# EAGLE board 20140312_FT_1.2b (EAGLE 6.5.0)
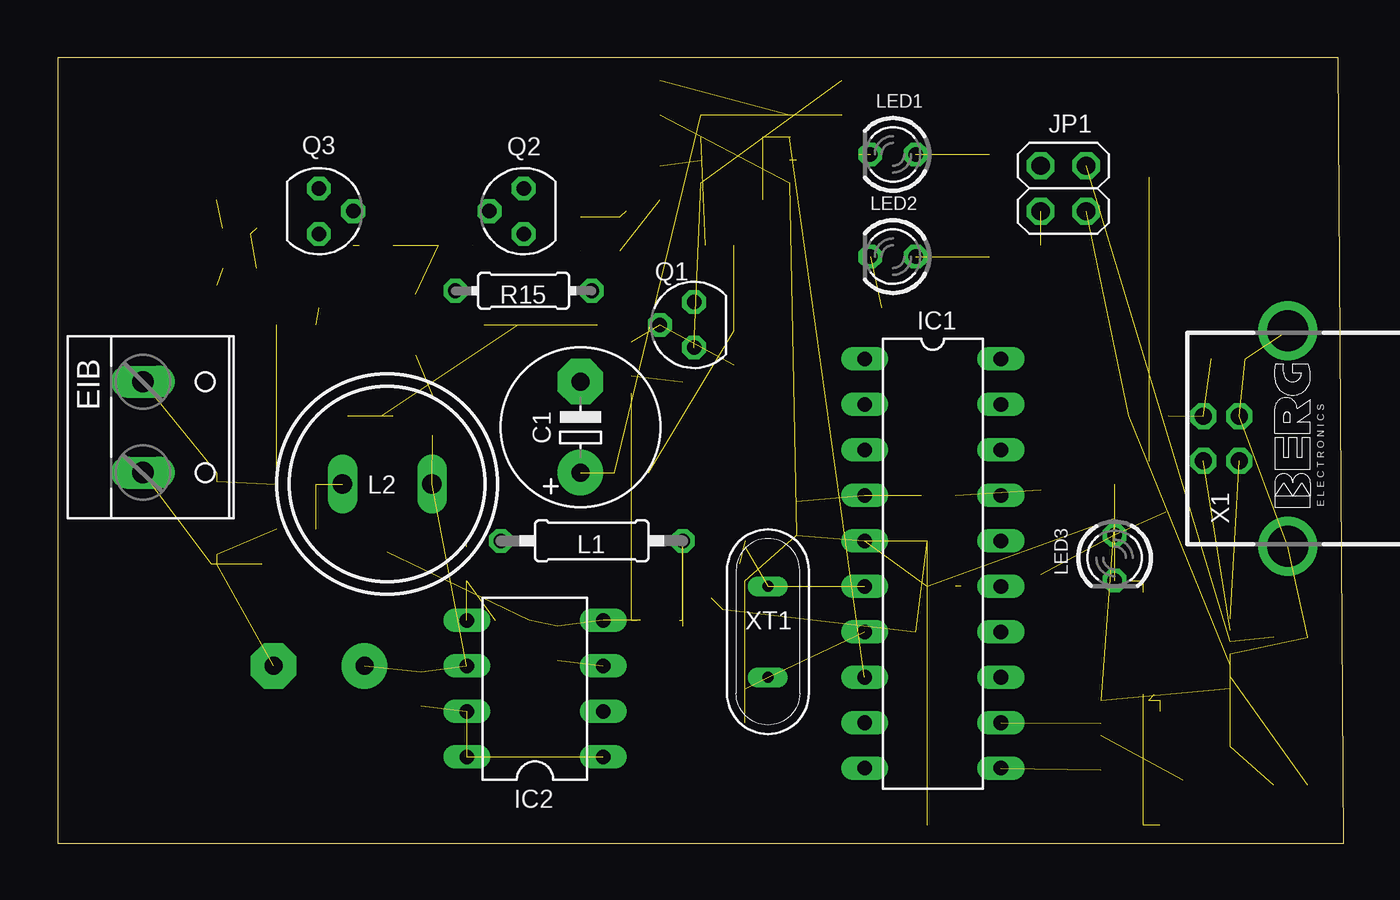
[diagram p0: board, top side]
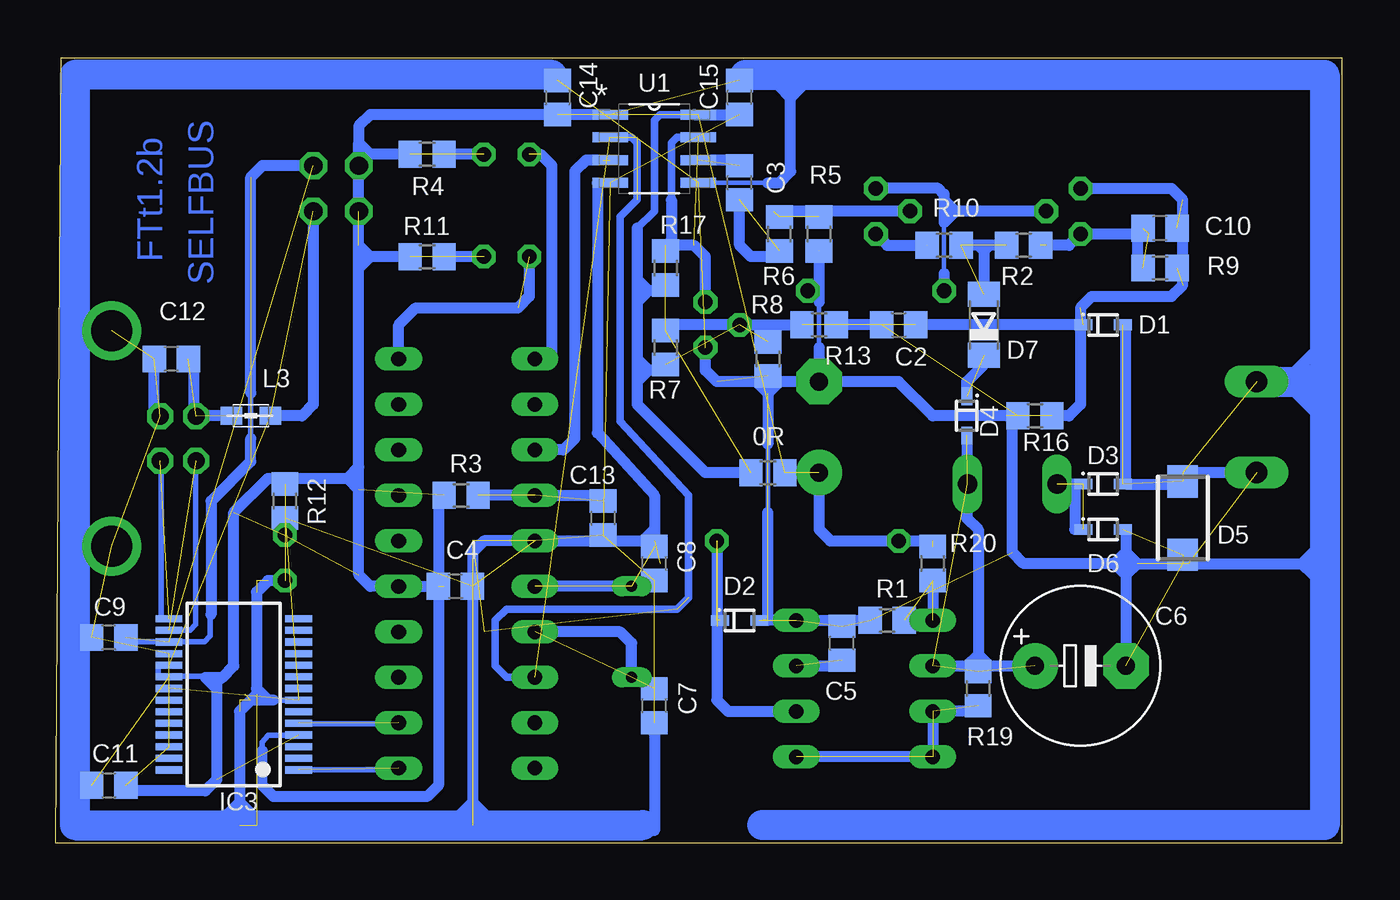
[diagram p1: board, bottom side, seen from below]

Size 71.86 x 43.87 mm. Coordinates in mm from the lower left corner, seen from the top.
Outline: 0,0 71.86,0 71.54,43.87 0,43.87 0,0
Copper layers (1*16): Top 0.035mm / dielectric 1.5mm / Bottom 0.035mm
Design rules "default": minimum track width 10mil, minimum drill 24mil, track to track 8mil, track to pad 8mil, pad to pad 8mil, via to via 8mil, smd to smd 8mil, copper to edge 40mil, drill to drill 8mil, minimum pad ring 10mil, minimum via ring 8mil, stop-mask expansion 4mil, vias tented up to drill 0mil, thermal gap 10mil

## Footprints (pad centres in the part's own frame; a part is rotated, then mirrored left to right if it is on the bottom)
R0805 = smd 1.3 x 1.5: 1 -0.95,0; 2 0.95,0
E5-8,5 = drill 1.016 pad 2.54: + -2.54,0 | drill 1.016 pad 2.54 octagon: - 2.54,0
C0805 = smd 1.3 x 1.5: 1 -0.95,0; 2 0.95,0
SOD323F = smd 1 x 0.6: A 1.1,0; C -1.1,0
SMA = smd 1.8 x 1.7: 1 -2.05,0; 2 2.05,0
SOD80C = smd 1.4 x 1.8: A 1.7,0; C -1.7,0
W237-132 = drill 1.194 long: 1 -2.54,-0.635; 2 2.54,-0.635
DIL20 = drill 0.813 long: 1 -11.43,-3.81; 2 -8.89,-3.81; 3 -6.35,-3.81; 4 -3.81,-3.81; 5 -1.27,-3.81; 6 1.27,-3.81; 7 3.81,-3.81; 8 6.35,-3.81; 9 8.89,-3.81; 10 11.43,-3.81; 11 11.43,3.81; 12 8.89,3.81; 13 6.35,3.81; 14 3.81,3.81; 15 1.27,3.81; 16 -1.27,3.81; 17 -3.81,3.81; 18 -6.35,3.81; 19 -8.89,3.81; 20 -11.43,3.81
DIL08 = drill 0.813 long: 1 -3.81,-3.81; 2 -1.27,-3.81; 3 1.27,-3.81; 4 3.81,-3.81; 5 3.81,3.81; 6 1.27,3.81; 7 -1.27,3.81; 8 -3.81,3.81
SSOP28 = smd 0.4 x 1.5: 1 -4.225,-3.625; 2 -3.575,-3.625; 3 -2.925,-3.625; 4 -2.275,-3.625; 5 -1.625,-3.625; 6 -0.975,-3.625; 7 -0.325,-3.625; 8 0.325,-3.625; 9 0.975,-3.625; 10 1.625,-3.625; 11 2.275,-3.625; 12 2.925,-3.625; 13 3.575,-3.625; 14 4.225,-3.625; 15 4.225,3.625; 16 3.575,3.625; 17 2.925,3.625; 18 2.275,3.625; 19 1.625,3.625; 20 0.975,3.625; 21 0.325,3.625; 22 -0.325,3.625; 23 -0.975,3.625; 24 -1.625,3.625; 25 -2.275,3.625; 26 -2.925,3.625; 27 -3.575,3.625; 28 -4.225,3.625
2X02 = drill 1.016 octagon: 1 -1.27,-1.27; 2 -1.27,1.27; 3 1.27,-1.27; 4 1.27,1.27
0207/10 = drill 0.813 octagon: 1 -5.08,0; 2 5.08,0
SD12_1000 = drill 1.1 long: 1 -2.5,0; 2 2.5,0
0805 = smd 1.2 x 1: 1 -1.1,0; 2 1.1,0
LED3MM = drill 0.813 octagon: A -1.27,0; K 1.27,0
SOT54A = drill 0.813 octagon: B 0,1.905; C -1.27,0; E 1.27,0
SOT54D = drill 0.813 octagon: B 1.27,0; C 0,1.905; E -1.27,0
0204/7 = drill 0.813 octagon: 1 -3.81,0; 2 3.81,0
SOIC127P600X175-8N = smd 1.981 x 0.559: 1 -2.464,1.905; 2 -2.464,0.635; 3 -2.464,-0.635; 4 -2.464,-1.905; 5 2.464,-1.905; 6 2.464,-0.635; 7 2.464,0.635; 8 2.464,1.905
PN61729-S = drill 0.95 octagon: 1 1.25,4.71; 2 -1.25,4.71; 3 -1.25,2.71; 4 1.25,2.71 | drill 2.3 pad 2.9: S1 -6.02,0; S2 6.02,0
QS = drill 0.61 long: 1 -2.54,0; 2 2.54,0

## Placement (x,y rotation side)
0R  [R0805]  32.07,20.7 0 bottom
C1  100Uf/16V  [E5-8,5]  29.21,23.24 90 top
C2  100nF  [C0805]  24.77,28.96 0 bottom
C3  10nF  [C0805]  33.66,36.89 90 bottom
C4  100nF  [C0805]  49.53,14.35 180 bottom
C5  470pF  [C0805]  27.94,11.18 90 bottom
C6  100uF/63v  [E5-8,5]  14.61,9.91 0 bottom
C7  30pF  [C0805]  38.42,7.68 90 bottom
C8  30pF  [C0805]  38.42,15.62 90 bottom
C9  100nF  [C0805]  68.9,11.49 180 bottom
C10  10nF  [C0805]  10.16,34.35 180 bottom
C11  100nF  [C0805]  68.9,3.24 0 bottom
C12  10nF  [C0805]  65.41,27.05 180 bottom
C13  100nF  [C0805]  41.27,18.16 90 bottom
C14  100nF  [C0805]  43.81,41.66 270 bottom
C15  100nF  [C0805]  33.66,41.66 90 bottom
D1  1N4148  [SOD323F]  13.34,28.96 0 bottom
D2  BAT46  [SOD323F]  33.66,12.45 0 bottom
D3  1N4148  [SOD323F]  13.34,20.07 0 bottom
D4  1N4148  [SOD323F]  20.95,23.88 270 bottom
D5  SMAJ43CA  [SMA]  8.89,18.16 90 bottom
D6  1N4148  [SOD323F]  13.34,17.53 0 bottom
D7  7V5  [SOD80C]  20,28.96 90 bottom
EIB  [W237-132]  5.4,23.24 270 top
IC1  [DIL20]  48.9,15.62 270 top
IC2  [DIL08]  26.67,8.64 90 top
IC3  FT232RL  [SSOP28]  61.91,8.32 90 bottom
JP1  [2X02]  56.2,36.58 90 top
L1  220uH  [0207/10]  29.84,16.89 0 top
L2  150mH  [SD12_1000]  18.41,20.07 0 top
L3  Ferrite bead  [0805]  60.96,23.88 0 bottom
LED1  [LED3MM]  46.67,38.48 180 top
LED2  [LED3MM]  46.67,32.77 180 top
LED3  [LED3MM]  59.05,15.94 270 top
Q1  BC557B  [SOT54A]  35.56,28.96 90 top
Q2  BC547  [SOT54A]  26.04,35.31 90 top
Q3  BC640  [SOT54D]  14.61,35.31 270 top
R1  2K2  [R0805]  25.4,12.45 0 bottom
R2  1K  [R0805]  17.78,33.4 0 bottom
R3  5K6  [R0805]  49.21,19.43 0 bottom
R4  470R  [R0805]  51.12,38.48 180 bottom
R5  100K  [R0805]  29.21,34.04 270 bottom
R6  5K6  [R0805]  31.43,34.04 270 bottom
R7  47K  [R0805]  37.78,27.69 90 bottom
R8  47K  [R0805]  32.07,27.05 90 bottom
R9  1K  [R0805]  10.16,32.13 180 bottom
R10  2K2  [R0805]  22.23,33.4 0 bottom
R11  470R  [R0805]  51.12,32.77 180 bottom
R12  470R  [R0805]  59.05,19.11 270 bottom
R13  10K  [R0805]  29.21,28.96 0 bottom
R15  5R6  [0204/7]  26.04,30.86 180 top
R16  100K  [R0805]  17.14,23.88 180 bottom
R17  10K  [R0805]  37.78,32.13 90 bottom
R19  3R3  [R0805]  20.32,8.64 90 bottom
R20  3K6  [R0805]  22.86,15.62 90 bottom
U1  ADUM1201ARZ  [SOIC127P600X175-8N]  38.42,38.8 0 bottom
X1  [PN61729-S]  68.74,22.61 90 top
XT1  7.372800  [QS]  39.69,11.81 270 top

## Library data of the parts
0R C1-C15 L1 R1-R13 R15-R17 R19 R20 = rcl
D1-D4 D6 = diodes_smd
D5 = SMAJ_SM6T_P6SMB
D7 = diode
EIB = con-wago-508
IC1 = micro-philips
IC2 = mc34063
IC3 = ftdichip
JP1 = pinhead
L2 = inductor-neosid
L3 = wuerth-elektronik
LED1-LED3 = led
Q1-Q3 = transistor-small-signal
U1 = ADUM1201ARZ; MPN: ADUM1201ARZ; OC_FARNELL: 1078200; OC_NEWARK: 19M0753; PACKAGE: SOIC-8; SUPPLIER: Analog Devices
X1 = con-berg
XT1 = special

## Nets
DRAIN: C2.1 C10.1 D1.C Q3.E R9.1 R16.2
N$1: C3.1 R6.2
N$2: C2.2 R13.1
N$3: IC2.5 R1.2 R20.1
N$4: IC2.1 IC2.7 IC2.8 R19.1
N$5: C3.2 U1.6
N$6: Q2.C R10.1
N$7: Q2.E Q3.C R15.2
N$8: D3.C D6.C L2.1
N$9: D4.C D7.C
N$12: Q2.B R5.1 R6.1
N$13: C5.1 IC2.3
N$14: Q1.B R7.1 R8.2 R13.2
N$15: C10.2 Q3.B R2.2 R9.2
N$16: D1.A D3.A D5.2 EIB.1
N$17: IC1.8 U1.2
N$18: C7.2 IC1.7 XT1.2
N$19: C8.2 IC1.6 XT1.1
N$20: IC1.11 IC3.1
N$21: C13.2 IC1.4 R3.2
N$22: IC1.12 IC3.5
N$23: LED1.A R4.2
N$24: LED2.A R11.2
N$25: IC1.20 LED2.K
N$26: IC1.1 LED1.K
N$27: C11.1 IC3.19 IC3.20 JP1.1 L3.2
N$28: IC3.15 X1.3
N$29: IC3.16 X1.2
N$30: C4.2 C15.2 IC1.15 IC3.4 JP1.2 JP1.4 LED3.A R3.1 R4.1 R11.1 U1.1
N$31: C9.1 IC3.17 JP1.3
N$33: C12.1 L3.1 X1.1
N$35: LED3.K R12.1
N$38: C1.- C5.2 C6.- C14.1 D2.A D5.1 D6.A EIB.2 IC2.4 Q1.C R1.1 R5.2 R8.1 R15.1 R16.1 U1.5
N$43: C6.+ D4.A IC2.6 L2.2 R19.2
N$46: Q1.E R17.1 U1.7
N$50: 0R.1 R7.2 R17.2
N$52: D2.C IC2.2 L1.2
N$58: IC1.3 U1.3
N$65: C4.1 C7.1 C8.1 C9.2 C11.2 C12.2 C13.1 C15.1 IC1.5 IC3.7 IC3.18 IC3.21 IC3.25 IC3.26 R12.2 U1.4 X1.4 X1.S1 X1.S2
REF: D7.A R2.1 R10.2
VCC: 0R.2 C1.+ C14.2 L1.1 R20.2 U1.8

## Tracks (layer width: path | path; a pad name or v marks a point on that pad's centre or on a via)
DRAIN  (5 unrouted)
  Bottom 0.61: Q3.E 9.53,36.58 8.89,35.94 8.89,31.18 9.53,30.54 13.97,30.54 14.61,29.91 14.61,24.51 15.24,23.88 16.51,23.88
N$1  (1 unrouted)
N$2  (1 unrouted)
N$3  (2 unrouted)
  Bottom 0.61: R20.1 IC2.5
N$4  (3 unrouted)
  Bottom 0.61: 20.32,7.37 IC2.7 IC2.8 IC2.1
N$5  (1 unrouted)
N$6  (1 unrouted)
  Bottom 0.61: Q2.C 25.4,33.4 R10.1
N$7
  Bottom 0.254: 22.23,34.67 22.23,31.81
  Bottom 0.61: Q3.C 21.59,35.31 | 21.59,35.31 22.23,35.31 | Q2.E 22.54,36.58 22.23,36.26 22.23,35.94 | 22.23,35.94 22.23,34.67 21.59,35.31 | 22.23,31.81 22.23,31.18 22.54,30.86 R15.2 | 21.59,35.31 22.23,35.94
N$8  (2 unrouted)
N$9  (1 unrouted)
N$10
  Bottom 0.61: 0.64,26.42 2.54,26.42 1.59,27.37
N$11
  Bottom 0.305: 64.03,21.42 64.03,12.23 64.36,11.9 65.48,11.9
N$12  (2 unrouted)
  Bottom 0.61: Q2.B 31.75,35.31
N$13  (1 unrouted)
  Bottom 0.61: IC2.3 28.26,9.91
N$14  (3 unrouted)
  Bottom 0.61: 30.16,28.96 Q1.B 37.78,28.96
N$15  (3 unrouted)
  Bottom 0.61: 10.79,34.04 Q3.B 15.24,33.4 16.51,33.4
N$16  (4 unrouted)
  Bottom 1.676: EIB.1 1.27,25.78
N$17  (1 unrouted)
N$18  (2 unrouted)
  Bottom 0.61: XT1.2 39.69,11.18 40.32,11.81 IC1.7
N$19  (2 unrouted)
  Bottom 0.61: XT1.1 IC1.6
N$20  (1 unrouted)
N$21  (2 unrouted)
  Bottom 0.61: 41.27,19.43 IC1.4 R3.2
N$22  (1 unrouted)
N$23  (1 unrouted)
  Bottom 0.61: LED1.A 50.16,38.48
N$24  (1 unrouted)
  Bottom 0.61: LED2.A 49.85,32.77
N$25  (1 unrouted)
  Bottom 0.61: IC1.20 52.7,28.96 51.75,29.91 46.04,29.91 45.4,30.54 LED2.K
N$26  (1 unrouted)
  Bottom 0.61: IC1.1 44.45,27.05 44.13,27.37 44.13,37.85 44.77,38.48
N$27  (4 unrouted)
  Bottom 0.61: JP1.1 57.47,24.51 58.1,23.88 60.01,23.88
N$28  (1 unrouted)
N$29  (1 unrouted)
N$30  (10 unrouted)
  Bottom 0.61: 62.55,9.27 63.5,9.27 62.87,8.64 | 62.55,9.27 61.91,9.91 61.91,18.48 60.01,20.38 55.56,20.38 | 40.96,40.7 54.29,40.7 54.93,40.07 54.93,39.12 | 54.93,32.13 54.93,32.77 | 54.93,32.77 54.93,33.4 | 54.93,33.4 JP1.4 | JP1.4 54.93,38.48 | 54.93,38.48 54.93,39.12 | 52.07,32.77 54.29,32.77 | 54.29,32.77 54.93,32.77 | 54.29,32.77 54.93,33.4 | 54.29,32.77 54.93,32.13 | 52.07,38.48 54.29,38.48 | 54.29,38.48 54.93,38.48 | 54.29,38.48 54.93,39.12 | 54.29,38.48 JP1.4 | 62.55,9.27 62.87,8.95 62.87,8.64 | 62.87,8.64 62.87,3.56 | 54.93,21.02 55.56,20.38 | 55.56,20.38 54.93,19.75 | 54.93,32.13 54.93,14.99 54.29,14.35 IC1.15 50.16,14.35
N$31  (3 unrouted)
  Bottom 0.61: JP1.3 60.33,37.85 60.96,37.21 60.96,25.15 | 63.18,12.76 63.18,19.11 60.96,21.34 60.96,22.61
N$32
  Bottom 0.61: 8.89,20.07 12.06,20.07 12.06,28.96
N$33  (2 unrouted)
N$34
  Bottom 0.61: 11.43,34.67 11.43,32.13
N$35  (8 unrouted)
  Bottom 0.305: 58.1,8 59.69,8
  Bottom 0.61: LED3.K 60.01,14.67 60.64,14.03 60.64,8.64 | 60.64,8.64 60.64,8.32 60.96,8 | 60.96,8 61.59,7.37 61.59,2.29 | 61.59,2.29 61.59,1.02 | 59.69,8 60.01,8 | 60.01,8 60.96,8 | 60.64,8.64 60.01,8 | 62.23,1.65 61.59,2.29 | 61.59,2.29 60.64,1.33
  Bottom 1.676: 44.13,42.93 70.8,42.93 70.8,1.02 61.59,1.02 39.05,1.02
N$36
  Bottom 0.61: 33.66,38.16 35.88,38.16
N$37
  Bottom 0.61: 19.05,33.4 19.68,33.4 | 19.68,33.4 20,33.4 | 20,33.4 20.32,33.4 | 20.32,33.4 20.95,33.4 | 20,33.4 20,33.08 | 20,33.08 20,30.86 | 20.32,33.4 20,33.08 | 20,33.08 19.68,33.4
N$38  (19 unrouted)
  Bottom 0.254: 29.21,30.23 29.21,27.69 | 32.07,22.29 32.07,18.16
  Bottom 0.305: 29.21,27.69 29.21,27.05
  Bottom 0.61: 18.73,23.88 22.86,23.88 24.77,25.78 C1.- | R15.1 29.53,30.86 | 29.53,30.86 29.21,30.54 | 29.21,30.54 29.21,30.23 | 29.21,27.69 C1.- | R5.2 29.21,31.18 | 29.21,31.18 29.21,30.54 | 29.53,30.86 29.21,31.18 | 11.43,15.62 12.06,15.62 | 12.06,15.62 12.7,15.62 | 12.7,15.62 17.78,15.62 18.41,16.26 18.41,23.88 | C1.- 31.43,25.78 | 31.43,25.78 32.07,25.78 | 32.07,25.78 32.7,25.78 | 32.7,25.78 34.92,25.78 35.56,26.42 Q1.C | R1.1 IC2.4 32.07,12.45 | 32.07,12.45 32.38,12.45 | 12.06,17.53 12.06,16.26 | 12.06,16.26 12.06,15.62 | 12.06,15.62 12.06,14.99 | 12.06,14.99 C6.- | 11.43,15.62 12.06,14.99 | 12.06,14.99 12.7,15.62 | 12.7,15.62 12.06,16.26 | 12.06,16.26 11.43,15.62 | 32.07,25.15 32.07,25.78 | 31.43,25.78 32.07,25.15 | 32.07,25.15 32.7,25.78 | 11.43,15.62 2.22,15.62 | 2.22,15.62 1.27,15.62 | 2.22,15.62 1.59,16.26 | 2.22,15.62 1.59,14.99 | EIB.2 9.21,20.7 | 32.07,12.45 32.07,18.16 32.07,18.48 | 32.07,25.15 32.07,22.29
N$39
  Bottom 0.61: 20.95,24.83 20.95,25.78 20,26.73 20,27.37
N$40
  Bottom 0.61: 14.29,28.96 23.5,28.96
N$41
  Bottom 0.305: 65.97,12.55 65.97,21.26
N$42
  Bottom 0.61: 25.72,28.96 28.26,28.96
N$43  (4 unrouted)
  Bottom 0.61: 20.95,22.61 20.95,18.16 20.32,17.53 20.32,10.54 | 20.32,10.54 R19.2 | IC2.6 20.95,9.91 | 20.95,9.91 19.68,9.91 | 19.68,9.91 C6.+ | 20.32,10.54 20.95,9.91 | 20.32,10.54 19.68,9.91
N$44
  Bottom 0.61: 14.61,20.07 14.92,20.07 | 14.92,20.07 15.88,20.07 | 14.92,20.07 14.92,17.53
N$45
  Bottom 0.61: 31.43,32.77 33.02,32.77 33.66,33.4 33.66,35.94
N$46  (2 unrouted)
  Bottom 0.61: Q1.E 35.56,32.77 36.2,33.4 37.78,33.4
N$47
  Bottom 0.406: 37.47,33.72 37.47,33.4 | 37.47,35.94 37.47,39.12 37.15,39.43 36.2,39.43
  Bottom 0.61: 37.47,35.94 37.47,33.72
N$48
  Bottom 1.676: 33.34,42.93 0.95,42.93 0.95,1.02 32.38,1.02
N$49
  Bottom 0.305: 58.42,6.03 60.01,6.03 60.33,5.65 60.33,4.76
N$50  (2 unrouted)
N$51
  Bottom 0.305: 65.32,11.26 63.54,11.26 63.22,11.58 63.22,13.19
N$52  (5 unrouted)
  Bottom 0.61: L1.2 34.92,8 34.29,7.37 IC2.2
N$54
  Bottom 0.61: 1.59,25.15 2.54,25.15 1.59,24.19
N$56
  Bottom 0.305: 60.97,25.13 60.97,22.07
N$57
  Bottom 0.61: 38.42,6.1 38.42,0.7
N$58  (1 unrouted)
  Bottom 0.61: 41.27,38.16 42.23,38.16 42.86,37.53 42.86,22.61 43.5,21.97 IC1.3
N$59
  Bottom 0.61: 66.36,23.88 66.36,27.37
N$60
  Bottom 0.61: 64.14,27.05 64.14,23.88 61.91,23.88
N$61
  Bottom 0.305: 66.13,9.97 66.13,9.32
N$62
  Bottom 0.305: 65.81,11.26 67.74,11.26
N$63
  Bottom 0.254: 35.88,36.89 32.07,36.89
  Bottom 0.305: 32.07,36.89 31.75,36.89
  Bottom 0.61: 32.07,36.89 31.43,36.89 30.8,37.53 30.8,41.66 | 30.8,41.66 30.8,42.93 | 30.8,41.66 31.43,42.29 | 30.8,41.66 30.16,42.29
N$64
  Bottom 0.61: 62.87,3.56 63.5,2.92 67.63,2.92
N$65  (26 unrouted)
  Bottom 0.406: 40.32,39.43 39.69,39.43 39.37,39.12 39.37,35.94 40.32,34.99 40.32,23.56 36.51,19.43 36.51,13.72 37.15,13.08 46.67,13.08 47.31,12.45 47.31,9.91 46.67,9.27 45.4,9.27
  Bottom 0.61: 41.59,36.89 41.59,22.92 38.42,19.43 38.42,17.53 | 39.05,16.89 IC1.5 47.94,16.89 48.58,16.26 48.58,2.29 | 39.05,16.89 38.42,16.89 38.42,17.53 | 48.58,2.29 48.58,1.33 | 49.21,1.65 48.58,2.29 | 48.58,2.29 47.94,1.65 | 38.42,17.53 39.05,16.89
N$66
  Bottom 0.305: 64.84,9.32 63.55,9.32
N$67
  Bottom 0.406: 39.37,34.35 38.42,35.31 38.42,40.39 38.1,40.7 36.2,40.7
  Bottom 0.61: 33.34,20.7 35.56,20.7 39.37,24.51 39.37,25.78 | 37.78,30.86 38.73,30.86 | 38.73,30.86 39.37,30.86 | 39.37,30.86 39.37,30.23 | 39.37,30.23 39.37,27.05 | 39.37,27.05 39.37,26.42 | 39.37,26.42 39.37,25.78 | 39.37,34.35 39.37,31.5 | 39.37,31.5 39.37,30.86 | 38.73,30.86 39.37,30.23 | 37.78,26.42 38.73,26.42 | 38.73,26.42 39.37,26.42 | 38.73,26.42 39.37,27.05 | 38.73,26.42 39.37,25.78 | 38.73,30.86 39.37,31.5 | 36.2,40.7 33.34,40.7
N$68
  Bottom 0.305: 58.36,4.1 52.61,4.1
N$69
  Bottom 0.61: 50.48,19.43 50.48,3.24 51.12,2.6 59.69,2.6 60.33,3.24 60.33,5.14
N$70
  Bottom 0.305: 58.29,6.67 52.7,6.67
REF  (2 unrouted)
VCC  (4 unrouted)
  Bottom 0.61: C1.+ 29.21,17.53 28.57,16.89 L1.1 22.86,16.89

## Text on the board
Bottom: SELFBUS | FTt1.2b